# Altium PCB PCB1.PcbDoc (part 2 of 2)
Units mm, origin at the board's own origin, x right, y up, seen from the top; angles counter-clockwise.
Board outline 75.44 x 74.04 mm, 4 copper layers (Top, GND, PWR, Bottom), stack 0.603 mm thick; 52 components, 44 nets, 218 pads, 48 vias.
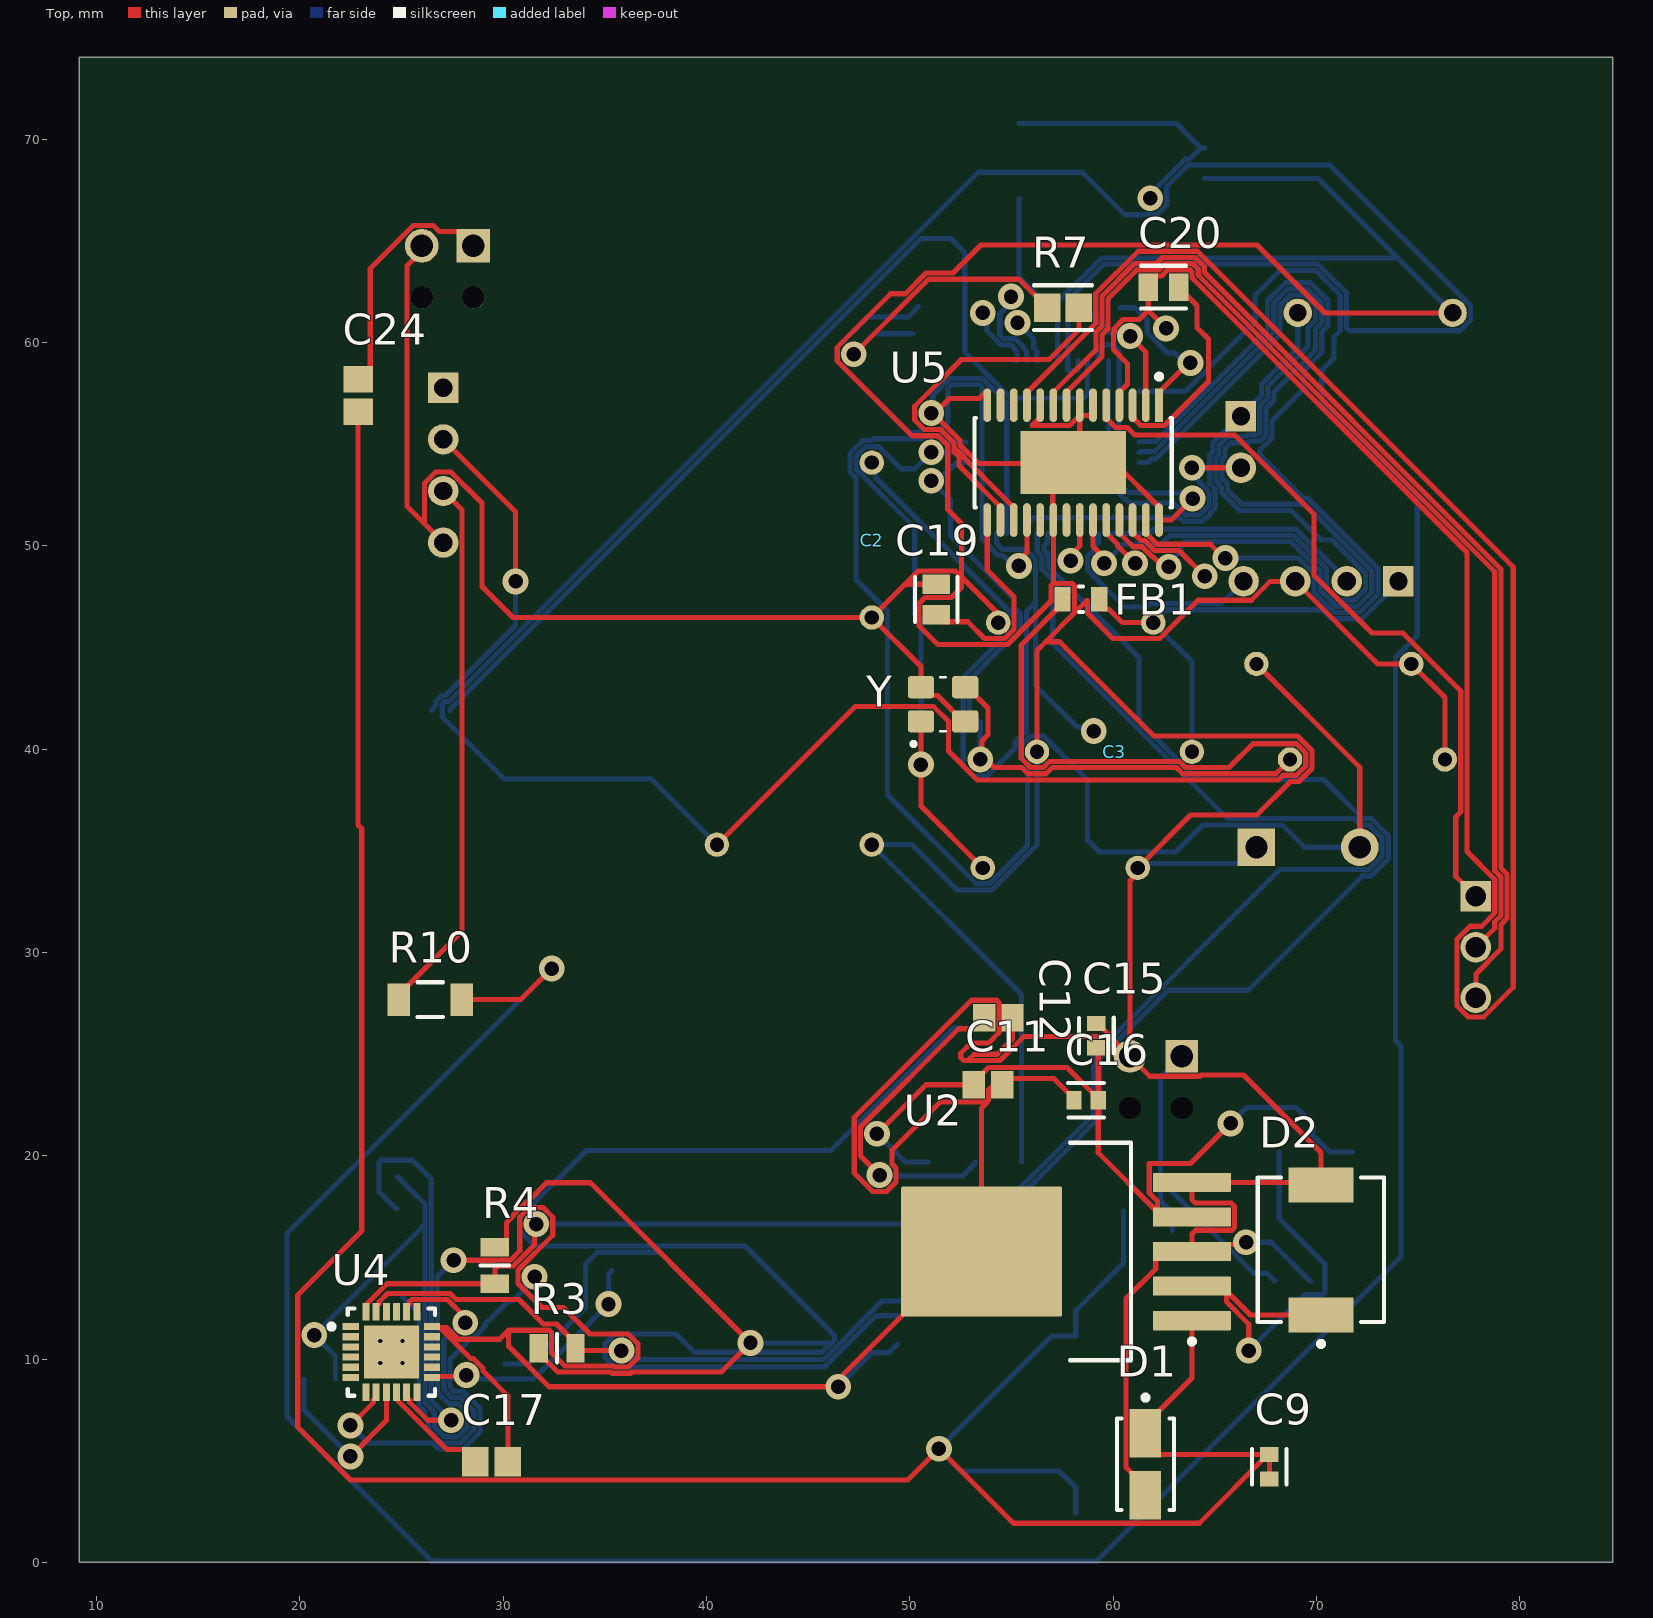
[diagram p0: Top view]

## Via types
v1: diameter 1.27, hole 0.711, Top to Bottom, 44 vias
v2: diameter 0.5, hole 0.2, Top to Bottom, 4 vias

## Nets (pads, with @x,y where several pads share a name; then routed paths per layer and width w, separated by ;. In a path a pad name is that pad's centre, name@x,y a point inside that pad or via, vN(x,y) a via of type N, cw(c..) or ccw(c..) an arc to the next point about the centre after c; other vN are vias at no path point) (continued)
SDA: (continued)
  Bottom w0.254: v1(31.623,16.637) 53.644,16.637 59.052,22.045 59.052,24.922 68.206,34.077 72.592,34.077 73.238,34.723 73.238,35.635 72.592,36.281 72.163,36.281 71.859,36.585 65.645,36.585 57.035,45.195 57.035,47.654 57.266,47.885 57.266,48.095 56.492,48.869 56.492,49.48 56.273,49.699 U1.44
SWCLK: P2.4 U1.38 | length 11
  Bottom w0.254: U1.38 59.273,50.164 59.1,49.991 59.1,49.834 58.751,49.485 58.751,48.813 60.574,46.99 61.639,46.99 61.816,47.167 65.328,47.167 P2.4
SWDIO: P2.2 U1.37 | length 12.9
  Bottom w0.254: U1.37 61.796,50.614 62.005,50.823 68.999,50.823 71.501,48.321 P2.2
UART_RX: R10.1 U1.25 | length 160.3
  Top w0.254: R10.1 30.861,27.686 v1(32.385,29.21)
  Bottom w0.254: v1(32.385,29.21) 19.363,16.188 19.363,7.174 26.49,0.048 59.189,0.048 74.168,15.027 74.168,25.4 73.899,25.669 73.899,44.518 74.968,45.587 74.968,52.347 70.269,57.046 70.269,58.643 70.877,59.251 70.877,60.297 71.181,60.601 71.181,62.335 69.955,63.561 68.221,63.561 66.995,62.335 66.995,61.045 63.564,57.614 U1.25
UART_TX: R9.1 U1.22 | length 48.9
  Bottom w0.254: R9.1 27.374,41.96 50.538,65.124 52.024,65.124 52.705,64.443 52.705,59.542 54.97,57.277 58.547,57.277 58.75,57.48 58.75,59.091 U1.22
pads on no net: J1.MH1 J1.MH2 J2. U1.1 U1.2 U1.3 U1.4 U1.8 U1.9 U1.10 U1.11 U1.12 U1.13 U1.14 U1.18 U1.26 U1.27 U1.28 U1.29 U1.33 U1.34 U1.39 U1.40 U1.41 U1.42 U1.46 U4.1 U4.2 U4.3 U4.4 U4.5 U4.6 U4.7 U4.12 U4.14 U4.15 U4.16 U4.17 U4.19 U4.21 U4.22 U4.25 U5.12 U5.13 U5.19 U5.21
copper on no net:
  other v2: 23.949,9.794 25.049,9.794 23.949,10.894 25.049,10.894

## Text inside footprints (layer, text, board x,y; h text height)
C8: Bottom Overlay "+" at 57.666,13.625 h1.22 r270
C21: Bottom Overlay "+" at 55.872,64.58 h1.22 r90